# Altium PCB C500_DBR_ADT07016BR50_V1.0.2.PcbDoc
Units mil, origin at the board's own origin, x right, y up, seen from the top; angles counter-clockwise.
Board outline 7007.87 x 3937.01 mil, 2 copper layers (top, bottom), stack 12.7 mil thick; 134 components, 128 nets, 438 pads, 507 vias.
Unrouted connection lines stored in the file: 375.
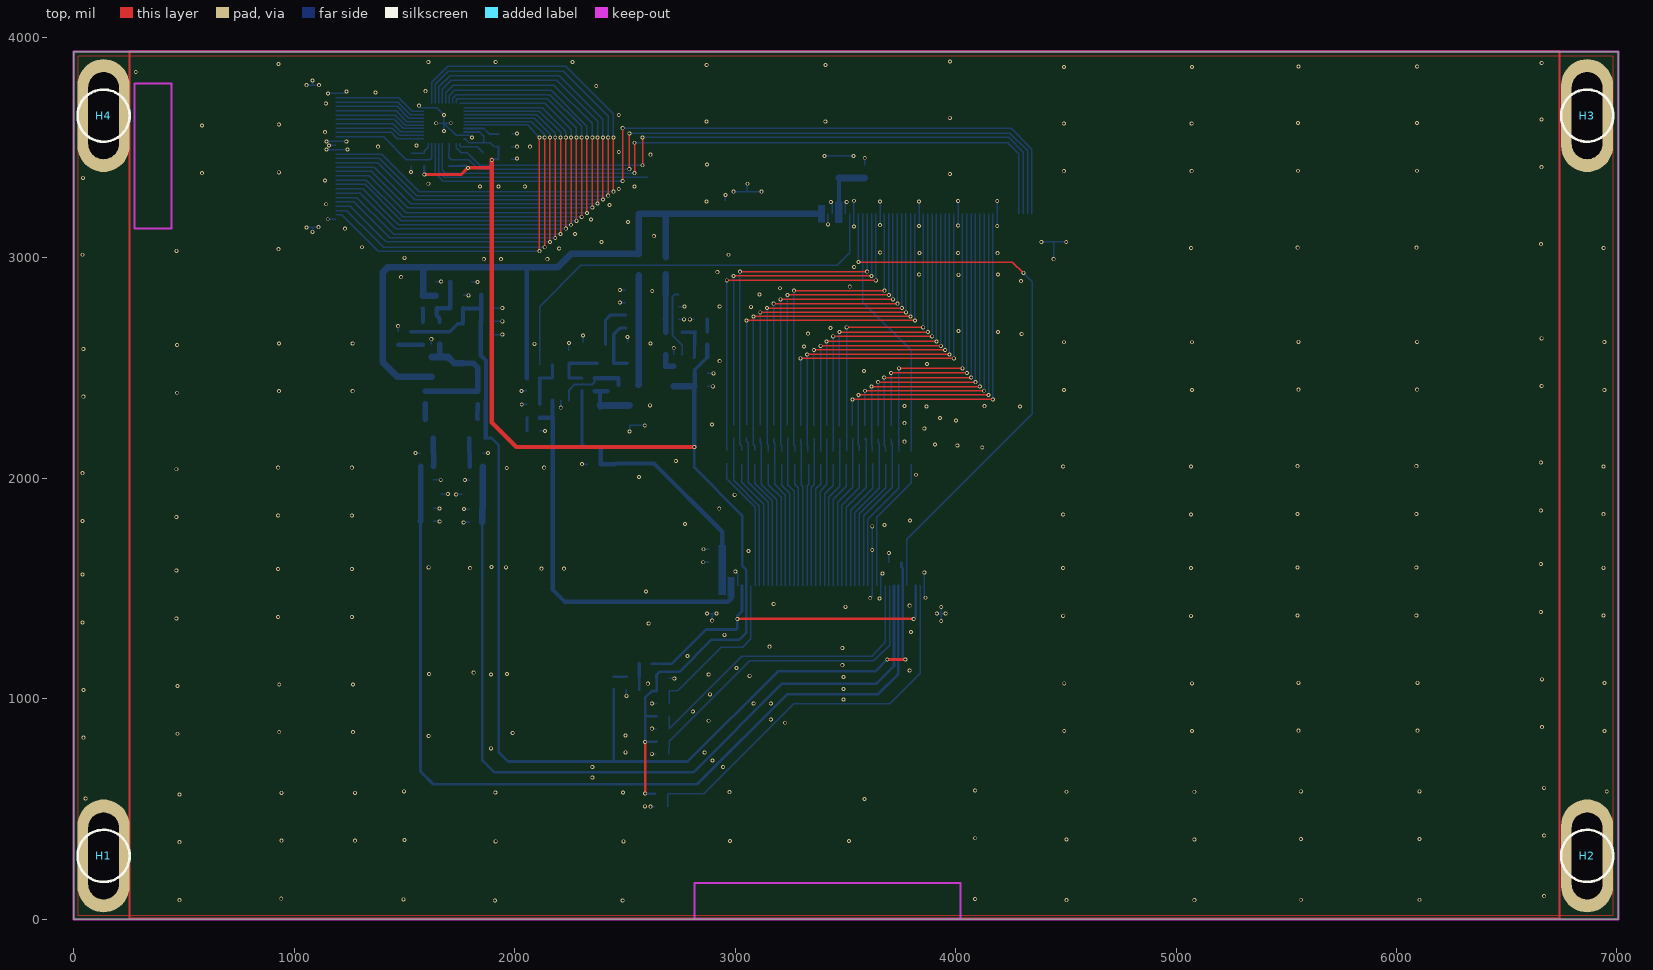
[diagram p0: top view]
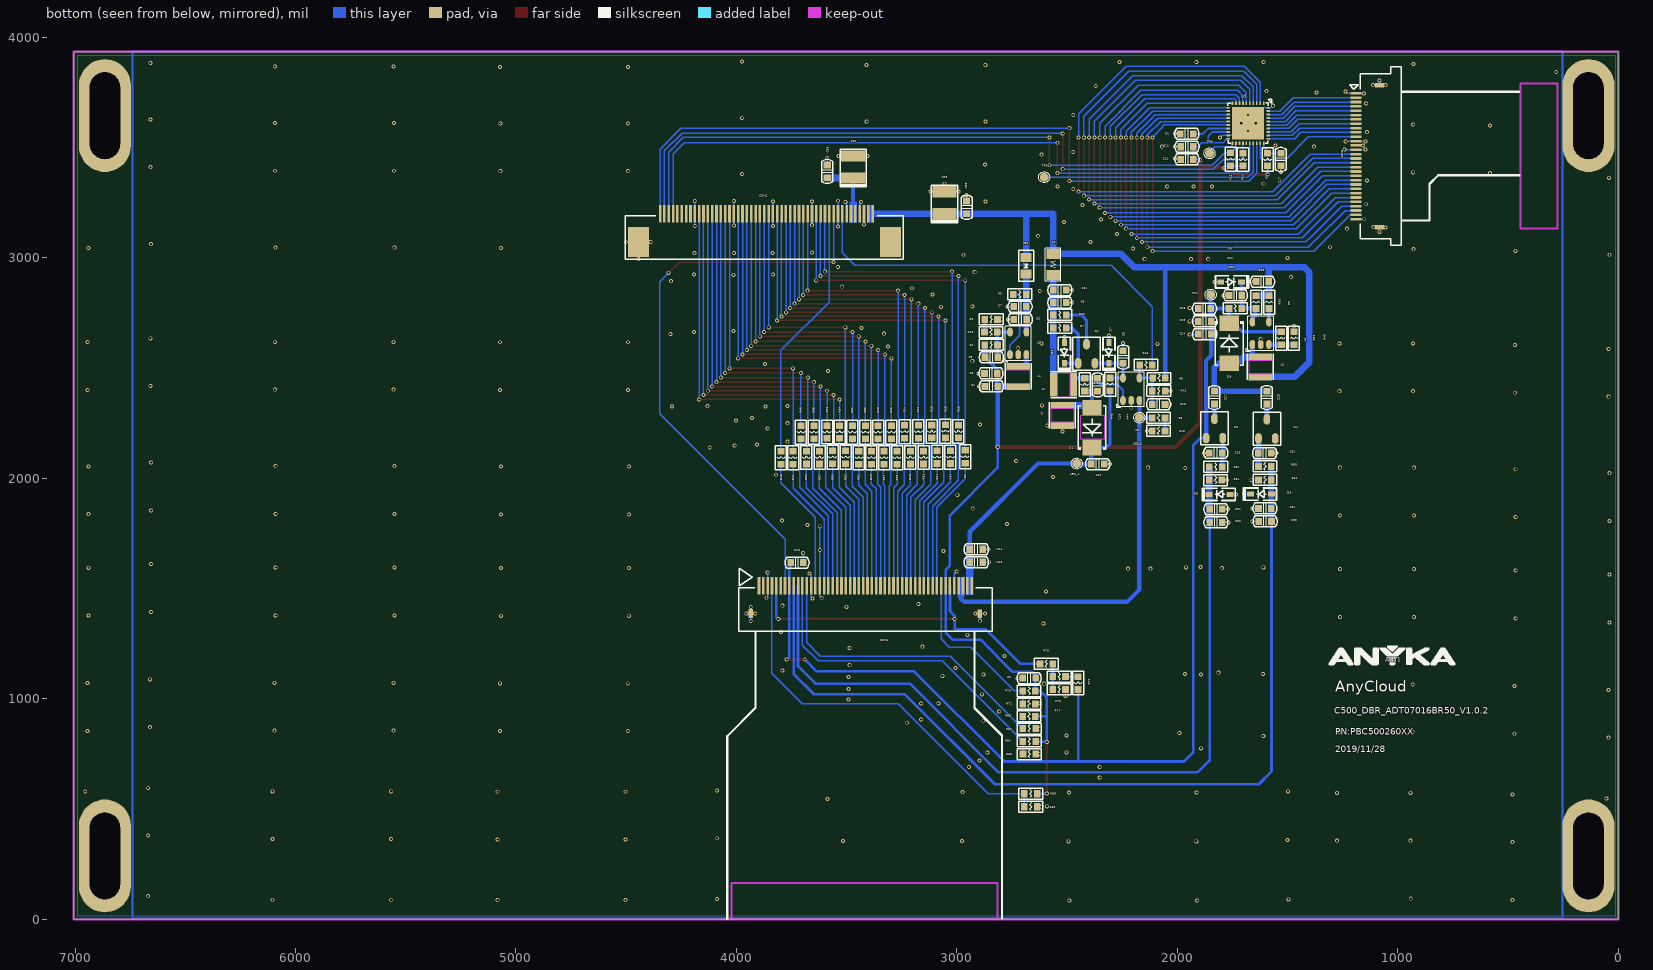
[diagram p1: bottom view, seen from below]

## Layer stack, top to bottom
Top Solder: solder mask 0.4, Solder Resist, Dk 3.5
top: signal copper 1.35
Dielectric 1: dielectric 10, FR-4, Dk 4.3
bottom: signal copper 1.35
Bottom Solder: solder mask 0.4, Solder Resist, Dk 3.5

## Board outline
-1,-1.4 7006.87,-1.4 7006.87,3935.61 -1,3935.61

## Design rules (kind name [scope] priority, off if disabled: settings)
Clearance "Clearance - Default - DEFAULT- SMD" [IsVia vs IsSMTPin] p1: gap=6 ignorepadtopadclearanceinfootprint=FALSE
Clearance "Clearance - Default - DEFAULT - Via" [IsVia vs IsVia] p2: gap=6 ignorepadtopadclearanceinfootprint=FALSE
Clearance "Clearance - Default - DEFAULT - Net" [All] p3: gap=6 ignorepadtopadclearanceinfootprint=FALSE except(0: Arc-Hole Track-Hole SMDPad-Hole THPad-Hole Via-Hole Fill-Hole Poly-Hole Region-Hole Text-Hole; 10: Text-Text)
ComponentClearance "ComponentClearance - Default - DEFAULT" [All] p1: gap=6 collisioncheckmode=3 verticalgap=10 showdistances=FALSE
FanoutControl Fanout_Small [(CompPinCount < 5)] p3: bgadir=Out bgaviamode=Centered fanoutstyle=Auto fanoutdirection=OutThenIn viagrid=1 // Fanout_Small (Default Rule)
FanoutControl Fanout_SOIC [IsSOIC] p4: bgadir=Out bgaviamode=Centered fanoutstyle=Auto fanoutdirection=Alternating viagrid=1 // Fanout_SOIC (Default Rule)
HoleToHoleClearance "HoleToHoleClearance - Default - DEFAULT" [All] p1: gap=6 allowstackedmicrovias=TRUE
Length "Default Length" [All] p1: maxlimit=50000 minlimit=0
MaxMinImpedance "Default Impedance" [All] p1: minimum=50.00 maximum=150.0
ParallelSegment "Default Parallel Segment Adjasent" [All] p1: limit=1000 gap=200
ParallelSegment "Default Parallel Segment Same Layer" [All] p2: limit=1000 gap=200
PlaneConnect "Default PlaneConnect" [All] p1: planeconnectstyle=Direct reliefexpansion=20 reliefentries=4 reliefconductorwidth=10 reliefairgap=10
PolygonConnect "PolygonConnect - Default SMT" [IsSMTPin] p1: connectstyle=Direct reliefconductorwidth=10 reliefentries=4 polygonreliefangle="45 Angle" airgapwidth=10
PolygonConnect "PolygonConnect - Default Pad" [All] p2: connectstyle=Direct reliefconductorwidth=10 reliefentries=4 polygonreliefangle="45 Angle" airgapwidth=10
RoutingLayers "RoutingLayers - Default - DEFAULT" [All] p1: top layer_v5=TRUE bottom layer_v5=TRUE
RoutingPriority "RoutingPriority - Default - DEFAULT" [All] p1: routingpriority=3
RoutingTopology "Default Routing Topology" [All] p1: topology=Shortest
RoutingVias "RoutingVias - Default - DEFAULT" [All] p1: holewidth=10 width=18 viastyle="Through Hole" minholewidth=10 minwidth=18 maxholewidth=10 maxwidth=18
SMDToCorner "SMDToCorner - Default - DEFAULT" [All] p1: distance=60000
SolderMaskExpansion [All] p1: expansion=4 istentingtop=FALSE
Width "Default Width" [All] p1: maxlimit=6 minlimit=6 preferedwidth=6
20 further rules are at their usual default settings.

## Components (designator, comment, footprint, x,y, rotation, side; value= is the part's Value field where it differs from the comment)
ANY1 "LOGO_ANYKA" LOGO_ANYKA 1024,1179.6 r180 bottom
C1 "C0603" C0603 1957,3562 r0 bottom
C2 "C0603" C0603 2672,1093 r0 bottom
C3 "C0603" C0603 2712.6,2721 r0 bottom
C4 "C0603" C0603 2843.6,2417 r180 bottom
C5 "C0603" C0603 2843.6,2549 r0 bottom
C6 "C0603" C0603 2845.6,2476 r180 bottom
C7 "C0603" C0603 2713.6,2779 r0 bottom
C8 "C0603" C0603 2246,2550 r90 bottom
C9 "C0603" C0603 2533,2797 r180 bottom
C10 "C0603" C0603 2361,2064 r180 bottom
C11 "C0603" C0603 1956,3504 r0 bottom
C12 "C0603" C0603 1956,3447 r0 bottom
C13 "C0603" C0603 3725,1617 r180 bottom
C14 "C0603" C0603 2912,1678 r180 bottom
C15 "C0603" C0603 2912,1619 r180 bottom
C16 "C0603" C0603 2362,2424 r270 bottom
C17 "C0603" C0603 1530,3446 r270 bottom
C18 "C0603" C0603 2085,2335 r180 bottom
C21 "C0603" C0603 2533,2854 r180 bottom
C22 "C0603" C0603 1736.6,2830 r0 bottom
C23 "C0603" C0603 1613.6,2892 r0 bottom
C24 "C0603" C0603 1875.6,2654 r0 bottom
C25 "C0603" C0603 1875.6,2712 r0 bottom
C26 "C0603" C0603 1876.6,2770 r0 bottom
C27 "C0603" C0603 1831.6,2366 r270 bottom
C28 "C0603" C0603 1593.6,2366 r270 bottom
C29 "C0603" C0603 1825.6,2115 r180 bottom
C30 "C0603" C0603 1824.6,1800 r0 bottom
C31 "C0603" C0603 1824.6,1860 r180 bottom
C32 "C0603" C0603 1603.6,2114 r0 bottom
C33 "C0603" C0603 1601.6,1804 r180 bottom
C34 "C0603" C0603 1602.6,1863 r0 bottom
C88 "C0603" C0603 3588,3392 r270 bottom
C89 "C0603" C0603 2956,3229 r270 bottom
CON1 "CON50_0MM5" CON50_0MM5 3864,3200 r180 bottom
CON2 "CON30_0MM5" CON30_0MM5 1150,3460.6 r90 bottom
CON4 "SAT070AT50D18_LCD" SAT070AT50D18_LCD 2933,1473 r180 bottom
CP2 "C1210_PN" C1210_PN 3470,3412 r90 bottom
CP3 "C1210_PN" C1210_PN 3056,3250 r90 bottom
D1 "SS14" SS14 2387,2230 r270 bottom
D2 "BAV-99_SOT23_123" BAV-99_SOT23_123 1831.6,2226 r180 bottom
D3 "UDZS5.6B" UDZS5.6B 2512,2569 r270 bottom
D4 "BAV-99_SOT23_123" BAV-99_SOT23_123 1593.6,2224 r180 bottom
D5 "SS14" SS14 1764.6,2612 r90 bottom
D6 "UDZS5.6B" UDZS5.6B 1755.6,2891 r180 bottom
D7 "UDZS5.6B" UDZS5.6B 2310,2569 r270 bottom
D8 "UDZS5.6B" UDZS5.6B 1808.6,1927 r0 bottom
D9 "UDZS5.6B" UDZS5.6B 1620.6,1928 r0 bottom
FB1 "FB0805" FB0805 2686,2964 r90 bottom
H1 "SCREWING_H_3MM" SCREWING_H_3MM 135,287 r0 top
H2 "SCREWING_H_3MM" SCREWING_H_3MM 6865,287 r0 top
H3 "SCREWING_H_3MM" SCREWING_H_3MM 6865,3645 r0 top
H4 "SCREWING_H_3MM" SCREWING_H_3MM 135,3645 r0 top
L1 "L_SWPA3012_3X3MM" L_SWPA3012_3X3MM 2721.6,2462 r270 bottom
L2 "L_SWPA3012_3X3MM" L_SWPA3012_3X3MM 2516,2424 r180 bottom
L3 "L_SWPA3012_3X3MM" L_SWPA3012_3X3MM 1623.6,2505 r90 bottom
L4 "L_SWPA3012_3X3MM" L_SWPA3012_3X3MM 2521,2285 r90 bottom
L5 "L1206" L1206 2563,2969 r180 bottom
LED_A "TP40" TP40 2456,2067 r180 bottom
LED_K "TP40" TP40 2172,2275 r180 bottom
Q1 "2N3904$2F$PMBT3904_SOT23_BCE_NPN" 2N3904$2F$PMBT3904_SOT23_BCE_NPN 2412,2565 r180 bottom
R1 "R0603" R0603 1590,3446 r90 bottom
R2 "R0603" R0603 2962,2098 r90 bottom
R3 "R0603" R0603 2714.6,2834 r0 bottom
R4 "R0603" R0603 2844.6,2605 r180 bottom
R5 "R0603" R0603 2844.6,2721 r180 bottom
R6 "R0603" R0603 2083,2454 r0 bottom
R7 "R0603" R0603 2533,2682 r0 bottom
R8 "R0603" R0603 2085,2274 r0 bottom
R9 "R0603" R0603 1583.6,2799 r270 bottom
R10 "R0603" R0603 1736.6,2771 r0 bottom
R11 "R0603" R0603 1702,3446 r90 bottom
R12 "R0603" R0603 1758,3447 r90 bottom
R13 "R0603" R0603 2993,2212 r90 bottom
R14 "R0603" R0603 3029,2096 r90 bottom
R15 "R0603" R0603 3052,2213 r90 bottom
R16 "R0603" R0603 2142,2514 r0 bottom
R17 "R0603" R0603 3090,2096 r90 bottom
R18 "R0603" R0603 2845.6,2663 r0 bottom
R19 "R0603" R0603 3114,2212 r90 bottom
R20 "R0603" R0603 2533,2741 r0 bottom
R21 "R0603" R0603 3151,2094 r90 bottom
R22 "R0603" R0603 3175,2211 r90 bottom
R23 "R0603" R0603 3211,2094 r90 bottom
R24 "R0603" R0603 3237,2211 r90 bottom
R25 "R0603" R0603 3271,2093 r90 bottom
R26 "R0603" R0603 3297,2209 r90 bottom
R27 "R0603" R0603 3330,2093 r90 bottom
R28 "R0603" R0603 3357,2209 r90 bottom
R29 "R0603" R0603 3388,2093 r90 bottom
R30 "R0603" R0603 3415,2209 r90 bottom
R31 "R0603" R0603 3445,2093 r90 bottom
R32 "R0603" R0603 3474,2209 r90 bottom
R33 "R0603" R0603 3505,2095 r90 bottom
R34 "R0603" R0603 3532,2210 r90 bottom
R35 "R0603" R0603 3564,2095 r90 bottom
R36 "R0603" R0603 3589,2210 r90 bottom
R37 "R0603" R0603 3623,2094 r90 bottom
R38 "R0603" R0603 3649,2209 r90 bottom
R39 "R0603" R0603 3683,2094 r90 bottom
R40 "R0603" R0603 3708,2209 r90 bottom
R41 "R0603" R0603 3743,2093 r90 bottom
R42 "R0603" R0603 2084,2396 r180 bottom
R43 "R0603" R0603 2420,2425 r90 bottom
R44 "R0603" R0603 2305,2426 r270 bottom
R45 "R0603" R0603 2085,2215 r180 bottom
R46 "R0603" R0603 3798,2093 r90 bottom
R49 "R0603" R0603 1471.6,2635 r270 bottom
R50 "R0603" R0603 1642.6,2799 r270 bottom
R51 "R0603" R0603 1528.6,2635 r90 bottom
R52 "R0603" R0603 1825.6,2052 r0 bottom
R54 "R0603" R0603 1826.6,1992 r0 bottom
R60 "R0603" R0603 1602.6,2054 r180 bottom
R61 "R0603" R0603 1602.6,1993 r180 bottom
R64 "R0603" R0603 2672,806 r0 bottom
R65 "R0603" R0603 2671,749 r180 bottom
R66 "R0603" R0603 2673,920 r0 bottom
R67 "R0603" R0603 2672,864 r180 bottom
R68 "R0603" R0603 2665,569 r0 bottom
R69 "R0603" R0603 2665,510 r180 bottom
R70 "R0603" R0603 2673,1035 r0 bottom
R71 "R0603" R0603 2673,977 r180 bottom
R72 "R0603" R0603 2450,1071 r90 bottom
R73 "R0603" R0603 2536,1100 r0 bottom
R74 "R0603" R0603 2536,1042 r180 bottom
R75 "R0603" R0603 2594,1158 r180 bottom
TP3 "TP40" TP40 2604,3366 r180 bottom
TP4 "TP40" TP40 1848.6,2833 r90 bottom
TP5 "TP40" TP40 1854,3474 r180 bottom
U2 "TLV62568_SOT23-5" TLV62568_SOT23-5 2721.6,2611 r180 bottom
U3 "MPS3302_SOT23-5" MPS3302_SOT23-5 2209,2403 r180 bottom
U4 "MPS3302_SOT23-5" MPS3302_SOT23-5 1621.6,2657 r180 bottom
U5 "ICNT8110" ICNT8110 1608,3701 r180 bottom

## Footprints (in the part's own frame and the unit in brackets; to place one, negate y for a bottom-side part, rotate by r counter-clockwise, add the part's x,y. Pads: shape width x height; smd on the part's side, far side on the other; paste and mask are expansions set on the pad)
2N3904$2F$PMBT3904_SOT23_BCE_NPN [mil]
  oval 30x48 smd: B(-38,-43.5) C(0,43.5) E(38,-43.5)
  silkscreen extent -63,-75 63,75
BAV-99_SOT23_123 [mil]
  oval 30x48 smd: 1(-38,-43.5) 2(38,-43.5) 3(0,43.5)
  silkscreen extent -63,-75 63,75
C0603 [mil]
  rect 30x32 smd: 1(-29,0) 2(29,0)
  silkscreen extent -55,-25 55,25
C1210_PN [mil]
  rect 51x110 smd: 1(-50,0) 2(50,0)
  silkscreen extent -90,-60 80,60
CON30_0MM5 [mm]
  rect 0.3x1.25 smd: 1(7.25,1) 2(6.75,1) 3(6.25,1) 4(5.75,1) 5(5.25,1) 6(4.75,1) 7(4.25,1) 8(3.75,1) 9(3.25,1) 10(2.75,1) 11(2.25,1) 12(1.75,1) 13(1.25,1) 14(0.75,1) 15(0.25,1) 16(-0.25,1) 17(-0.75,1) 18(-1.25,1) 19(-1.75,1) 20(-2.25,1) 21(-2.75,1) 22(-3.25,1) 23(-3.75,1) 24(-4.25,1) 25(-4.75,1) 26(-5.25,1) 27(-5.75,1) 28(-6.25,1) 29(-6.75,1) 30(-7.25,1)
  rect 0.5x1 smd: 31(-8.19,-1.7) 32(8.19,-1.7)
  silkscreen extent -10.25,-4.2 10.3,1.75
CON50_0MM5 [mm]
  rect 0.3x2 smd: 1(12.25,0) 2(11.75,0) 3(11.25,0) 4(10.75,0) 5(10.25,0) 6(9.75,0) 7(9.25,0) 8(8.75,0) 9(8.25,0) 10(7.75,0) 11(7.25,0) 12(6.75,0) 13(6.25,0) 14(5.75,0) 15(5.25,0) 16(4.75,0) 17(4.25,0) 18(3.75,0) 19(3.25,0) 20(2.75,0) 21(2.25,0) 22(1.75,0) 23(1.25,0) 24(0.75,0) 25(0.25,0) 26(-0.25,0) 27(-0.75,0) 28(-1.25,0) 29(-1.75,0) 30(-2.25,0) 31(-2.75,0) 32(-3.25,0) 33(-3.75,0) 34(-4.25,0) 35(-4.75,0) 36(-5.25,0) 37(-5.75,0) 38(-6.25,0) 39(-6.75,0) 40(-7.25,0) 41(-7.75,0) 42(-8.25,0) 43(-8.75,0) 44(-9.25,0) 45(-9.75,0) 46(-10.25,0) 47(-10.75,0) 48(-11.25,0) 49(-11.75,0) 50(-12.25,0)
  rect 2.4x3.5 smd: 51(-14.75,-3.25) 52(14.3,-3.25)
  silkscreen extent -16.25,-5.25 15.75,-0.25
FB0805 [mil]
  rect 40x50 smd: 1(-38,0) 2(38,0)
  silkscreen extent -71,-34 71,34
ICNT8110 [mm]
  rect 0.2x0.4 smd: 1(0,0) 2(-0.4,0) 3(-0.8,0) 4(-1.2,0) 5(-1.6,0) 6(-2,0) 7(-2.4,0) 8(-2.8,0) 9(-3.2,0) 10(-3.6,0) 21(-3.6,-4.6) 22(-3.2,-4.6) 23(-2.8,-4.6) 24(-2.4,-4.6) 25(-2,-4.6) 26(-1.6,-4.6) 27(-1.2,-4.6) 28(-0.8,-4.6) 29(-0.4,-4.6) 30(0,-4.6)
  rect 0.4x0.2 smd: 11(-4.1,-0.5) 12(-4.1,-0.9) 13(-4.1,-1.3) 14(-4.1,-1.7) 15(-4.1,-2.1) 16(-4.1,-2.5) 17(-4.1,-2.9) 18(-4.1,-3.3) 19(-4.1,-3.7) 20(-4.1,-4.1) 31(0.5,-4.1) 32(0.5,-3.7) 33(0.5,-3.3) 34(0.5,-2.9) 35(0.5,-2.5) 36(0.5,-2.1) 37(0.5,-1.7) 38(0.5,-1.3) 39(0.5,-0.9) 40(0.5,-0.5)
  rrect0% 3.7x3.7 smd: 41(-1.8,-2.3)
  silkscreen extent -4.15,-4.61 0.94,0.44
L1206 [mil]
  rect 60x45 smd: 1(0,47.5) 2(0,-47.5)
  silkscreen extent -35,-75 35,75
L_SWPA3012_3X3MM [mm]
  rect 0.8x2.7 smd: 1(-1.15,0) 2(1.15,0)
  silkscreen extent -1.5,-1.5 1.5,1.5
LOGO_ANYKA [mil]
  silkscreen extent -289,-28 284,59
MPS3302_SOT23-5 [mil]
  oval 25x40 smd: 1(-37.4,-50) 2(0,-50) 3(37.4,-50) 4(37.4,51.97) 5(-37.4,51.97)
  silkscreen extent -65,-84 59,79
R0603 [mil]
  rect 30x32 smd: 1(-29,0) 2(29,0)
  silkscreen extent -54,-25 54,25
SAT070AT50D18_LCD [mm]
  rect 0.3x2 smd: 1(-24.5,1) 2(-24,1) 3(-23.5,1) 4(-23,1) 5(-22.5,1) 6(-22,1) 7(-21.5,1) 8(-21,1) 9(-20.5,1) 10(-20,1) 11(-19.5,1) 12(-19,1) 13(-18.5,1) 14(-18,1) 15(-17.5,1) 16(-17,1) 17(-16.5,1) 18(-16,1) 19(-15.5,1) 20(-15,1) 21(-14.5,1) 22(-14,1) 23(-13.5,1) 24(-13,1) 25(-12.5,1) 26(-12,1) 27(-11.5,1) 28(-11,1) 29(-10.5,1) 30(-10,1) 31(-9.5,1) 32(-9,1) 33(-8.5,1) 34(-8,1) 35(-7.5,1) 36(-7,1) 37(-6.5,1) 38(-6,1) 39(-5.5,1) 40(-5,1) 41(-4.5,1) 42(-4,1) 43(-3.5,1) 44(-3,1) 45(-2.5,1) 46(-2,1) 47(-1.5,1) 48(-1,1) 49(-0.5,1) 50(0,1)
  rect 0.5x1 smd: 51(-25.453,-2.205) 52(0.937,-2.22)
  silkscreen extent -26.81,-4.25 2.37,3
SCREWING_H_3MM [mm]
  oval 6x13 hole 3.5 slot 10 at 90 deg: 1(0,0)
  silkscreen extent -3,-3 3,3
SS14 [mm]
  rect 1.8x2.2 smd: A(-2.3,0) K(2.3,0)
  silkscreen extent -2.5,-1.6 2.5,1.6
TLV62568_SOT23-5 [mil]
  oval 25x40 smd: 1(-37.4,-50) 2(0,-50) 3(37.4,-50) 4(37.4,51.97) 5(-37.4,51.97)
  silkscreen extent -65,-84 59,79
TP40 [mil]
  round 40 smd: 1(0,0)
  silkscreen extent -25,-25 25,25
UDZS5.6B [mm]
  rect 0.8x0.6 smd: 1(-1.2,0) 2(1.2,0)
  silkscreen extent -1.8,-0.7 2,0.7

## Via types
v1: diameter 18, hole 10, top to bottom, 507 vias

## Nets (pads, with @x,y where several pads share a name; then routed paths per layer and width w, separated by ;. In a path a pad name is that pad's centre, name@x,y a point inside that pad or via, vN(x,y) a via of type N, cw(c..) or ccw(c..) an arc to the next point about the centre after c; other vN are vias at no path point)
$$$3299: R5.1 R18.2 | length 58.4
  bottom w15: R5.1 2873.6,2664 R18.2
$$$8433: C3.1 C7.1 FB1.1 R3.1 U2.4 | length 264.1
  bottom w25: U2.4 2684.2,2720.4 C3.1 2684.6,2722 C7.1 2685.6,2780 R3.1
  bottom w30: R3.1 2686,2837.4 FB1.1
$$$8434: R3.2 U2.1 | length 313
  bottom w8: R3.2 2726.6,2834 2715.6,2823 2715.6,2648 2759.6,2604 2759.6,2561.6 U2.1
$$$8435: L1.1 U2.3 | length 91.1
  bottom w25: U2.3 2684.2,2507.28 L1.1
$$$8436: C5.1 R4.2 R18.1 U2.5 | length 172.4
  bottom w15: U2.5 R18.1@2816.57,2662.97 ; C5.1 2815.6,2550 R4.2 2816.6,2606 R18.1
$$$14688: R9.2 U4.4 | length 61.3
  bottom w20: R9.2 1584.2,2769.4 U4.4
$$$14690: C22.1 D6.2 R10.1 R50.2 U4.5 | length 249.6
  bottom w20: R50.2@1645.74,2771 R50.2@1646,2771 ; U4.5 1659,2726 1646,2739 R50.2@1646,2771 ; D6.2 1707.6,2890.24 C22.1 R10.1 R50.2@1646,2771
$$$15194: C8.1 D7.2 Q1.E R44.1 U3.5 | length 253.2
  bottom w15: R44.1 U3.5 2246.4,2520.6 C8.1 2246.76,2521.76 D7.2 2310.26,2521.5 Q1.E
$$$15436: R72.2 R73.1 | length 57
  bottom w12: R72.2 R73.1
$$$16113: R49.2 R51.1 U4.3 | length 113
  bottom w20: R49.2 R51.1 1583.2,2606 U4.3
$$$16377: C27.2 D2.3 | length 67.9
  bottom w20: D2.3 1830.6,2270.5 C27.2
$$$16547: C18.1 R6.2 R16.2 R42.1 U3.4 | length 239.1
  bottom w15: C18.1 2114,2395 R42.1 2113,2453 R6.2 2112.97,2454.97 U3.4 2171.6,2513.4 R16.2
$$$16697: C29.2 D2.2 R52.1 | length 131.7
  bottom w20: D2.2 1793.6,2118 C29.2 R52.1
$$$16886: C16.1 L2.2 R43.2 U3.1 | length 333.6
  bottom w10: U3.1 2246,2353.4 2246,2399 2273,2426 2352,2426 2362,2436 C16.1
  bottom w20: C16.1 2419,2453 R43.2 2470.72,2454 L2.2
$$$17098: C28.2 D4.3 | length 69.5
  bottom w25: D4.3 C28.2
$$$17167: C32.2 D4.1 R60.1 | length 127.3
  bottom w25: R60.1 1632.6,2055 C32.2 1631.6,2115 D4.1
$$$19028: R73.2 R74.1 R75.2 | length 116
  bottom w12: R74.1 R73.2
  bottom w15: R73.2 R75.2
$$$20137: Q1.C R20.1 | length 211
  bottom w15: Q1.C 2412,2718 2435,2741 R20.1
$$$20747: C16.2 D1.A L4.2 R43.1 | length 266.9
  bottom w20: C16.2 2387,2395 ; D1.A 2387,2330.28 2387,2395 ; R43.1 2419,2395 2387,2395
  bottom w30: D1.A@2387,2330.28 L4.2
$$$22232: C9.1 C21.1 L2.1 L5.2 R7.2 R20.2 | length 497.8
  bottom w30: L2.1 2562,2424.72 R7.2 R20.2 C9.1 C21.1 L5.2
$$$22340: R8.1 R45.2 | length 59
  bottom w15: R45.2 R8.1
$$$23973: D3.2 Q1.B R7.1 | length 260.2
  bottom w15: R7.1 2478,2682 2450,2654 Q1.B 2450.26,2521.76 D3.2
$$$24952: CON4.16 R41.1 | length 609.9
  bottom w6: CON4.16 3602.3,1814 3743,1954.7 R41.1
$$$24955: CON4.17 R40.1 | length 723.7
  bottom w6: CON4.17 3582.61,1829 3713,1959.39 3713,2157 3708,2162 R40.1
$$$24958: CON4.18 R39.1 | length 602.4
  bottom w6: CON4.18 3562.93,1838 3683,1958.07 R39.1
$$$24960: CON4.19 R38.1 | length 715.8
  bottom w6: CON4.19 3543.24,1843 3654.24,1954 3654.24,2156 3649.24,2161 3649.24,2179.76 R38.1
$$$24962: CON4.20 R37.1 | length 594.8
  bottom w6: CON4.20 3523.56,1855 3624,1955 3624,2064 R37.1
$$$24964: CON4.21 R36.1 | length 708.9
  bottom w6: CON4.21 3503.87,1868 3595,1959.13 3595,2175 R36.1
$$$24965: CON4.22 R35.1 | length 586.7
  bottom w6: CON4.22 3484.19,1877 3564,1956.81 R35.1
$$$24967: CON4.23 R34.1 | length 697.6
  bottom w6: CON4.23 3464.5,1890.5 3533,1959 3533,2180.5 R34.1
$$$24969: CON4.24 R33.1 | length 578.6
  bottom w6: CON4.24 3444.82,1904 3505,1964.18 R33.1
$$$24970: CON4.25 R32.1 | length 688.7
  bottom w6: CON4.25 3425.13,1915 3475,1964.87 3475,2179 R32.1
$$$24972: CON4.26 R31.1 | length 568
  bottom w6: CON4.26 3405.45,1929 3445,1968.55 R31.1
$$$24974: CON4.27 R30.1 | length 680.7
  bottom w6: CON4.27 3385.76,1942 3416,1972 3416,2179 R30.1
$$$24976: CON4.28 R29.1 | length 560.7
  bottom w6: CON4.28 3366.08,1952 3388,1973.92 R29.1
$$$24979: CON4.29 R28.1 | length 674.5
  bottom w6: CON4.29 3346.39,1959 3360,1972.61 3360,2177 R28.1
$$$24981: CON4.30 R27.1 | length 555.5
  bottom w6: CON4.30 3326.71,1967 3333,1973.29 3333,2061 R27.1
$$$24983: CON4.31 R26.1 | length 672.4
  bottom w6: R26.1 3298,2180 3298,2161 3300,2159 3300,1971.02 3307.02,1964 CON4.31
$$$24985: CON4.32 R25.1 | length 558.5
  bottom w6: R25.1 3271,1973 3287.34,1957 CON4.32
$$$24987: CON4.33 R24.1 | length 682.3
  bottom w6: R24.1 3238,2181 3238,1971.65 3267.65,1942 CON4.33
$$$24989: CON4.34 R23.1 | length 568.8
  bottom w6: R23.1 3211,1971.97 3210,1970.97 3247.97,1933 CON4.34
$$$24992: CON4.35 R22.1 | length 691.7
  bottom w6: R22.1 3175,2163 3180,2158 3180,1972.28 3228.28,1924 CON4.35
$$$24994: CON4.36 R21.1 | length 576.5
  bottom w6: R21.1 3151,1971.6 3208.6,1914 CON4.36
$$$24995: CON4.37 R19.1 | length 701.7
  bottom w6: R19.1 3113.91,2182.91 3113.91,2164 3118.91,2159 3118.91,1973 3188.91,1903 CON4.37
$$$24998: CON4.38 R17.1 | length 587.5
  bottom w6: R17.1 3090,1977.23 3169.23,1898 CON4.38
$$$25001: CON4.39 R15.1 | length 713.7
  bottom w6: R15.1 3052,2183 3050,2181 3050,2170 3059,2161 3059,1981.54 3149.54,1891 CON4.39
$$$25003: CON4.40 R14.1 | length 597.3
  bottom w6: R14.1 3029,1985.86 3028,1984.86 3129.86,1883 CON4.40
$$$25005: CON4.41 R13.1 | length 719.2
  bottom w6: R13.1 2993,1990.17 3110.17,1873 CON4.41
$$$25007: CON4.42 R2.1 | length 609.9
  bottom w6: R2.1 2962,1997.49 3090.49,1869 CON4.42
$$$26806: C17.1 R1.2 U5.30 | length 112.4
  bottom w6: C17.1 R1.2 1590,3484 1608,3502 U5.30
$$$27637: TP3.1 U5.27 | length 1088.2
  bottom w6: U5.27 1655.24,3390.76 1680,3366 TP3.1
$$$27638: TP5.1 U5.21 | length 132.6
  bottom w6: U5.21 1749.73,3510 1755.73,3504 1830,3504 1854,3480 TP5.1
$$$31504: CON4.14 R46.1 | length 616.4
  bottom w6: CON4.14 3641.67,1823.67 3798,1980 R46.1
+5V: C23.1 C89.2 CON1.1 CON1.2 CP3.1 FB1.2 L3.1 L5.1 R6.1 R9.1 R50.1 | length 3790.5
  bottom w6: CON1.1@3381,3221 3381.72,3220.28 CON1.1
  bottom w12: CON1.1 CON1.2
  bottom w20: R6.1 2054,2958
  bottom w30: L3.1 1469,2459.72 1401,2527.72 1401,2934 1425,2958 1584.6,2958 ; R50.1 R9.1 1584.6,2829 C23.1 1584.6,2958 ; FB1.2 2686,3200 ; CON1.1 CP3.1 C89.2 2686,3200 ; 1584.6,2958 2054,2958 2196,2958 2256,3018 2561.5,3018 L5.1 2563,3199 2562,3200 2686,3200
AVDD: C13.1 C24.1 C25.1 C26.1 CON4.8 D2.1 D5.K R10.2 R51.2 R72.1 TP4.1 | length 5355.9
  top w12: v1(3690,1178) v1(3772,1178)
  bottom w12: D2.1 1895,2182.5 1928.5,2149 1928.5,756 1969.5,715 2450,715 ; R72.1 2450,715 ; v1(3690,1178) 3636,1124 3194,1124 2785,715 2450,715 ; C13.1 3754.78,1616.22 3754.78,1596 3759.78,1591 CON4.8 3759.78,1190 3760,1190 v1(3772,1178)
  bottom w15: R51.2 1704.6,2664 1741.6,2701 1763.05,2701 D5.K
  bottom w20: D5.K 1765.6,2703.55 R10.2 1766.6,2770 C26.1 ; TP4.1 1848.6,2771 C26.1 ; D2.1 1870,2534 1846.6,2557.4 C24.1 C25.1 1847.6,2713 C26.1
AVDD_SW: C27.1 C28.1 D5.A L3.2 U4.1 | length 664.4
  bottom w25: C28.1 C27.1 1831.6,2503.45 1813.6,2521.45 D5.A ; L3.2 1656.27,2550.28 1659,2553 U4.1
  bottom w30: L3.2 1697.6,2550.28 1725.87,2522 1764.05,2522 D5.A
DITBH: CON4.4 R68.2 R69.1 | length 1827.7
  bottom w6: R69.1 R68.2 2695,570 2857.11,570 3265.11,978 3702,978 3839,1115 3839,1511.87 CON4.4
GND: C1.2 C2.2 C3.2 C4.1 C6.1 C7.2 C8.2 C9.2 C10.2 C11.2 C12.2 C13.2 C14.2 C15.2 C17.2 C18.2 C21.2 C22.2 C23.2 C24.2 C25.2 C26.2 C29.1 C30.1 C31.2 C32.1 C33.1 C34.2 C88.1 C89.1 CON1.3 CON1.4 CON1.7 CON1.9 CON1.15 CON1.24 CON1.33 CON1.42 CON1.51 CON2.1 CON2.12 CON2.13 CON2.14 CON2.30 CON2.31 CON2.32 CON4.3 CON4.13 CON4.15 CON4.46 CON4.51 CON4.52 CP2.2 CP3.2 D3.1 D4.2 D6.1 D7.1 D8.1 D9.2 H1.1 H2.1 H3.1 H4.1 L4.1 R5.2 R42.2 R45.1 R49.1 R54.1 R61.1 R65.2 R67.2 R69.2 R71.2 R74.2 U2.2 U3.2 U4.2 U5.19 U5.40 U5.41 | length 4412.5
  bottom w6: v1(1055,3138) 1055.16,3138.16 CON2.31 ; v1(1055,3783) 1055.04,3783.04 CON2.32 ; v1(1083,3118) 1083.07,3118.07 CON2.31 ; v1(1083,3804) 1083.07,3804 CON2.32 ; v1(1110,3139) 1109.16,3138.16 CON2.31 ; v1(1112,3783) 1111.96,3783.04 CON2.32 ; v1(1146,3492) 1147.87,3490.13 CON2.14 1240.13,3490.13 v1(1242,3492) ; v1(1146,3528) 1147.5,3529.5 CON2.12 1234.5,3529.5 v1(1236,3528) ; v1(1152,3175) 1152.17,3175.17 CON2.30 ; v1(1153,3746) CON2.1 1237,3746.03 v1(1237,3755) ; v1(1158,3510) 1158.19,3509.81 CON2.13 ; R49.1 v1(1471.6,2690) ; v1(1530,3390) C17.2 ; v1(1549.6,2114) C32.1 ; v1(1566,3690) 1566,3687.31 1572,3681.31 U5.40 1645.55,3681.31 v1(1678.87,3648) U5.41 ; U4.2 v1(1621.6,2631) ; C33.1 v1(1659.6,1804) ; C34.2 v1(1658.6,1863) ; R61.1 v1(1664.6,1993) ; C23.2 v1(1666.6,2892) ; v1(1644,3610.45) U5.41 ; D9.2 v1(1696.6,1928) ; v1(1678.87,3576) U5.41 ; v1(1710,3610.45) U5.41 ; v1(1734.6,1927) D8.1 ; C22.2 v1(1790.6,2830) ; v1(1768.6,1800) C30.1 ; U5.19 1782,3555.33 ; v1(1770.6,1860) C31.2 ; v1(1773.6,1992) R54.1 ; D6.1 v1(1831.6,2891) ; v1(1806,3546) 1794,3555.33 1782,3555.33 ; C29.1 1854.6,2114 v1(1879.6,2114) ; C24.2 1904.6,2652 v1(1944,2652) ; C25.2 v1(1944,2712) ; C26.2 1905.6,2772 v1(1944,2772) ; C12.2 2007,3447 v1(2010,3450) ; C11.2 v1(2010,3504) ; C1.2 2008,3562 v1(2010,3564) ; v1(2031,2396) R42.2 ; v1(2032,2335) C18.2 ; R45.1 v1(2137,2215) ; v1(2209,2320) U3.2 ; C8.2 v1(2246,2614) ; v1(2305,2064) C10.2 ; D7.1 v1(2310,2647) ; v1(2477,2797) C9.2 ; v1(2477,2854) C21.2 ; v1(2507,1013) R74.2 ; D3.1 v1(2512,2641) ; v1(2521,2212) L4.1 2589.72,2239.72 v1(2590,2240) ; v1(2616,510) R69.2 ; v1(2622,750) 2623,749 R65.2 ; v1(2622,864) R67.2 ; v1(2622,978) 2623,977 R71.2 ; C2.2 2723,1093 v1(2724,1092) ; U2.2 v1(2721.6,2590) ; C3.2 v1(2768.6,2721) ; C7.2 v1(2770.6,2779) ; v1(2794.6,2721) R5.2 ; v1(2855,1619) C15.2 ; v1(2856,1678) C14.2 ; C4.1 v1(2898.6,2417) ; v1(2873,1386) 2873.4,1385.6 CON4.52 ; C6.1 v1(2901.6,2476) ; v1(2896,1354) 2896.1,1354.1 CON4.52 ; v1(2916,1386) 2915.6,1385.6 CON4.52 ; C89.1 v1(2956,3285) ; v1(2992,3300) CP3.2 ; v1(3001,1577) 3011.75,1566.25 CON4.46 ; v1(3056,3336) CP3.2 ; v1(3119,3300) CP3.2 ; v1(3405,3462) CP2.2 v1(3537,3462) ; v1(3421,3152) 3421.09,3152.09 CON1.3 ; v1(3434,3253) 3440.77,3246.23 CON1.4 ; CON1.7 3499.83,3253 v1(3506,3253) ; v1(3539,3142) 3539.2,3142.2 CON1.9 3539.2,3258.8 v1(3539,3259) ; C88.1 v1(3588,3452) ; v1(3613,1456) 3621.98,1464.98 CON4.15 ; v1(3655,1454) 3661,1460 3661.35,1460 CON4.13 3661.35,1560.35 v1(3669,1568) ; v1(3657,3148) 3657.31,3148.31 CON1.15 3657.31,3254.69 v1(3657,3255) ; C13.2 3697,1618 v1(3697,1661) ; v1(3834,3145) 3834.47,3145.47 CON1.24 3834.47,3255.53 v1(3834,3256) ; v1(3858,1573) 3858.2,1572.8 CON4.3 3858.2,1463.8 v1(3864,1458) ; v1(3915,1386) 3915.2,1386.2 CON4.51 ; v1(3935,1353) 3935.1,1353.1 CON4.51 ; v1(3935,1416) 3935.1,1415.9 CON4.51 ; v1(3955,1386) 3954.8,1386.2 CON4.51 ; v1(4012,3146) 4011.64,3146.36 CON1.33 4011.64,3257.64 v1(4012,3258) ; v1(4189,3145) 4188.8,3145.2 CON1.42 4188.8,3257.8 v1(4189,3258) ; v1(4389,3072) 4389.05,3072.05 CON1.51 ; v1(4445,2994) 4444.71,2994.29 CON1.51 ; v1@4502,3072.05 CON1.51 ; U5.41 1733.98,3555.33 1782,3555.33
  bottom w8: CON4.15 v1(3621.98,1674) v1(3621.98,1782)
  other v1: 1910,84 2490,84 479,86 4503,86 5083,86 5566,88 6105,88 1496,90 4089,92 941,93 6670,104 480,349 1914,353 2494,353 2977,355 3516,355 942,356 1276,356 1500,359 4503,361 5083,361 5566,363 6105,363 4089,367 6670,379 2591,512 3587,545 54,548 480,566 942,573 1276,573 1912,574 2492,574 2975,576 4503,578 5083,578 6954,579 1498,580 5566,580 6105,580 4089,584 6670,596 2352,642 2352,690 2946,690 2898,720 2862,756 2503,757 1893,775 44,823 1610,831 2503,833 470,841 1991,845 932,848 1266,848 4493,853 5073,853 6944,854 5556,855 6095,855 6660,871 3227,891 2880,900 3162,906 2808,942 3084,978 3162,978 3492,996 2886,1020 44,1040 3492,1044 470,1058 932,1065 1266,1065 2604,1068 4493,1070 5073,1070 6944,1071 5556,1072 6095,1072 6660,1088 3492,1098 3066,1104 1893,1110 2880,1110 1612,1112 1965,1112 1814,1118 3792,1128 3006,1140 3486,1152 2784,1194 3486,1230 3156,1236 2952,1290 3798,1302 2608,1341 39,1346 465,1364 927,1371 1261,1371 4488,1376 5068,1376 6939,1377 5551,1378 6090,1378 6655,1394 3501,1417 3792,1422 3175,1429 2596,1486 39,1563 465,1581 927,1588 1261,1588 2122,1590 2224,1590 1798,1592 4488,1593 5068,1593 6939,1594 5551,1595 6090,1595 1610,1596 1961,1596 1895,1598 6655,1611 3061,1670 3678,1788 2773,1793 39,1806 3793,1809 465,1824 927,1831 1261,1831 4488,1836 5068,1836 6939,1837 5551,1838 6090,1838 6655,1854 2928,1862 2998,1925 2564,2006 3821,2016 39,2023 465,2041 1964,2046 927,2048 1261,2048 2134,2048 4488,2053 5068,2053 6939,2054 5551,2055 6090,2055 6655,2071 2731,2078 4121,2139 4008,2148 3906,2153 3768,2166 3858,2226 2895,2244 3768,2250 4002,2262 3930,2274 4292,2325 3868,2326 4131,2327 3768,2328 2614,2331 43,2370 469,2388 931,2395 1265,2395 4492,2400 5072,2400 6943,2401 5555,2402 6094,2402 6659,2418 3585,2486 3870,2518 2930,2531 43,2587 3312,2598 469,2605 2090,2610 931,2612 1265,2612 2616,2612 4492,2617 5072,2617 6943,2618 5555,2619 6094,2619 6659,2635 4300,2655 3330,2656 4193,2664 4013,2668 3432,2682 3072,2778 2930,2779 3111,2833 2624,2849 3204,2862 3520,2869 4297,2894 1485,2912 4013,2923 3835,2924 4192,2924 2919,2935 3540,2958 1860,2994 1938,2994 2148,2994 1500,3000 40,3014 2970,3014 4190,3021 3836,3022 4012,3022 3658,3024 466,3032 928,3039 2202,3042 5069,3044 6940,3045 5552,3046 6091,3046 1308,3048 6656,3062 2394,3072 4502,3072 2631,3098 2274,3108 1230,3132 2514,3162 2346,3174 2430,3240 1145,3243 2870,3255 2472,3312 1842,3324 1926,3324 2046,3324 2544,3324 1608,3336 1140,3351 42,3363 3974,3380 582,3384 930,3388 4491,3393 5071,3393 5554,3395 6093,3395 6658,3411 2872,3423 2616,3468 2472,3480 1380,3504 2070,3504 1554,3510 1140,3570 582,3600 930,3605 4491,3610 5071,3610 5554,3612 6093,3612 2870,3619 3409,3619 6658,3628 3974,3635 2472,3648 1143,3700 1368,3750 1596,3756 2370,3780 281,3843 4492,3866 5072,3866 5555,3868 6094,3868 2871,3875 3410,3875 929,3879 6659,3884 1608,3888 1914,3888 2262,3888 3975,3891
L/R: CON4.12 R66.2 R67.1 | length 1455.9
  bottom w6: R66.2 R67.1 3029,1192 3029,1193 3619,1193 3681.04,1255.04 CON4.12
LCD_3V3: C88.2 CON1.5 CON1.6 CP2.1 | length 324.5
  bottom w6: CON1.5@3459,3216 3460.46,3214.54 CON1.5
  bottom w12: CON1.5@3461,3235 3461,3244.14 3471,3254.14 3480.14,3245 CON1.6
  bottom w20: CP2.1 3471,3361 3471,3254.14
  bottom w30: CP2.1 3587,3362 C88.2
LCD_RESET: CON1.10 CON4.7 | length 2660.1
  top w6: v1(3559,2981) 4258,2981 4307,2932 v1(4308,2932)
  bottom w6: CON1.10 3558.88,2981.12 v1(3559,2981) ; CON4.7 3779.46,1724 4348,2292.54 4348,2892 v1(4308,2932)
LED_A: C10.1 C14.1 C15.1 CON4.49 CON4.50 D1.K LED_A.1 R44.2 | length 1225.2
  bottom w15: R44.2 2305,2157 2322,2140 2386.45,2140 D1.K
  bottom w20: D1.K 2390,2136.45 C10.1 2453,2064 LED_A.1 2632,2067 2941,1758 C14.1 C15.1
LED_K: CON4.47 CON4.48 LED_K.1 R8.2 U3.3 | length 1885.5
  bottom w10: CON4.48 2972.38,1465 2984,1453 2982,1454 2992.06,1462.06 CON4.47
  bottom w20: R8.2 2171,2274 LED_K.1 ; U3.3 2171.6,2275.4 LED_K.1 ; 2982,1454 2967,1439 2228,1439 2172,1495 LED_K.1
LED_PWM: CON1.8 R16.1 | length 1950.2
  bottom w6: R16.1 2113,2779 2300,2966 3463.51,2966 3519.51,3022 CON1.8
MODE: CON4.43 R70.2 R71.1 | length 765.9
  bottom w6: R71.1 R70.2 2739,1035 2938,1234 3033.8,1234 3070.8,1271 CON4.43
RGB_B0: CON1.16 R25.2 | length 1489.7
  top w6: v1(3267,2851) v1(3677,2851)
  bottom w6: v1(3267,2851) 3267,2152 3271,2148 R25.2 ; v1(3677,2851) CON1.16
RGB_B1: CON1.17 R24.2 | length 1420.1
  top w6: v1(3237,2832) v1(3697,2832)
  bottom w6: R24.2 v1(3237,2832) ; CON1.17 3696.68,2832.32 v1(3697,2832)
RGB_B2: CON1.18 R23.2 | length 1589.4
  top w6: v1(3206,2812) v1(3716,2812)
  bottom w6: v1(3206,2812) 3206,2152 3211,2147 R23.2 ; v1(3716,2812) 3716,3200 CON1.18
RGB_B3: CON1.19 R22.2 | length 1521
  top w6: v1(3175,2792) v1(3736,2792)
  bottom w6: R22.2 v1(3175,2792) ; v1(3736,2792) CON1.19
RGB_B4: CON1.20 R21.2 | length 1690.8
  top w6: v1(3145,2772) v1(3756,2772)
  bottom w6: v1(3145,2772) 3145,2155 3151,2149 R21.2 ; CON1.20 3756,3200 v1(3756,2772)
RGB_B5: CON1.21 R19.2 | length 1620.4
  top w6: v1(3114,2753) v1(3775,2753)
  bottom w6: R19.2 v1(3114,2753) ; v1(3775,2753) 3775,3200 CON1.21
RGB_B6: CON1.22 R17.2 | length 1791.8
  top w6: v1(3083,2734) v1(3796,2734)
  bottom w6: v1(3083,2734) 3083,2155 3090,2148 R17.2 ; CON1.22 3796,3200 v1(3796,2734)
RGB_B7: CON1.23 R15.2 | length 1723.2
  top w6: v1(3052,2716) v1(3816,2716)
  bottom w6: R15.2 v1(3052,2716) ; CON1.23 3815,3200 3815,2716 v1(3816,2716)
RGB_G0: CON1.25 R33.2 | length 1434.1
  top w6: v1(3506,2685) v1(3853,2685)
  bottom w6: R33.2 3506,2124 v1(3506,2685) ; v1(3853,2685) 3854.16,2680 CON1.25
RGB_G1: CON1.26 R32.2 | length 1370
  top w6: v1(3473,2663) v1(3874,2663)
  bottom w6: v1(3473,2663) 3473,2238 R32.2 ; CON1.26 3873.84,2660 v1(3874,2663)
RGB_G2: CON1.27 R31.2 | length 1530.1
  top w6: v1(3445,2644) v1(3894,2644)
  bottom w6: R31.2 v1(3445,2644) ; CON1.27 3893.53,2642.47 v1(3894,2644)
RGB_G3: CON1.28 R30.2 | length 1460.1
  top w6: v1(3415,2621) v1(3913,2621)
  bottom w6: R30.2 v1(3415,2621) ; v1(3913,2621) 3913.21,2621.21 CON1.28
RGB_G4: CON1.29 R29.2 | length 1623
  top w6: v1(3388,2601) v1(3933,2601)
  bottom w6: R29.2 v1(3388,2601) ; CON1.29 3932.9,2601.1 v1(3933,2601)
RGB_G5: CON1.30 R28.2 | length 1558.2
  top w6: v1(3357,2582) v1(3953,2582)
  bottom w6: R28.2 v1(3357,2582) ; CON1.30 3952.58,2582.42 v1(3953,2582)
RGB_G6: CON1.31 R27.2 | length 1724.4
  top w6: v1(3327,2562) v1(3972,2562)
  bottom w6: v1(3327,2562) 3327,2148 3330,2145 R27.2 ; v1(3972,2562) 3972.27,2562.27 CON1.31
RGB_G7: CON1.32 R26.2 | length 1657
  top w6: v1(3297,2544) v1(3992,2544)
  bottom w6: R26.2 v1(3297,2544) ; CON1.32 3991.95,2544.05 v1(3992,2544)
RGB_PCLK: CON1.11 R46.2 | length 1168.9
  bottom w6: CON1.11 3578.57,2799.43 3798,2580 R46.2
RGB_R0: CON1.34 R41.2 | length 1366.1
  top w6: v1(3743,2499) v1(4031,2499)
  bottom w6: R41.2 v1(3743,2499) ; v1(4031,2499) 4031.32,2499.32 CON1.34
RGB_R1: CON1.35 R40.2 | length 1305
  top w6: v1(3708,2478) v1(4051,2478)
  bottom w6: R40.2 v1(3708,2478) ; v1(4051,2478) CON1.35
RGB_R2: CON1.36 R39.2 | length 1474
  top w6: v1(3676,2457) v1(4071,2457)
  bottom w6: v1(3676,2457) 3676,2149 3680,2145 R39.2 ; CON1.36 4070.69,2457.31 v1(4071,2457)
RGB_R3: CON1.37 R38.2 | length 1403
  top w6: v1(3649,2436) v1(4090,2436)
  bottom w6: R38.2 v1(3649,2436) ; v1(4090,2436) 4090.38,2468 CON1.37
RGB_R4: CON1.38 R37.2 | length 1569.7
  top w6: v1(3619,2416) v1(4110,2416)
  bottom w6: v1(3619,2416) 3619,2150 3623,2146 R37.2 ; v1(4110,2416) 4110.06,2448 CON1.38
RGB_R5: CON1.39 R36.2 | length 1502.1
  top w6: v1(3589,2397) v1(4130,2397)
  bottom w6: R36.2 v1(3589,2397) ; CON1.39 4129.75,2397.25 v1(4130,2397)
RGB_R6: CON1.40 R35.2 | length 1668.6
  top w6: v1(3559,2378) v1(4149,2378)
  bottom w6: v1(3559,2378) 3559,2153 3564,2149 R35.2 ; v1(4149,2378) 4149.43,2378.43 CON1.40
RGB_R7: CON1.41 R34.2 | length 1598
  top w6: v1(3532,2358) v1(4169,2358)
  bottom w6: R34.2 v1(3532,2358) ; v1(4169,2358) 4169.12,2358.12 CON1.41
RGB_VOGATE: CON1.14 R2.2 | length 1749.4
  top w6: v1(2962,2898) v1(3638,2898)
  bottom w6: R2.2 v1(2962,2898) ; CON1.14 3638,3200 v1(3638,2898)
RGB_VOHSYNC: CON1.12 R14.2 | length 1655.2
  top w6: v1(3022,2937) v1(3599,2937)
  bottom w6: v1(3022,2937) 3022,2154 3029,2147 R14.2 ; CON1.12 3598.25,2937.75 v1(3599,2937)
RGB_VOVSYNC: CON1.13 R13.2 | length 1586.1
  top w6: v1(2993,2918) v1(3619,2918)
  bottom w6: R13.2 v1(2993,2918) ; CON1.13 3619,3200 v1(3619,2918)
RX1: CON2.11 U5.29 | length 546.7
  bottom w6: CON2.11 1405,3549.18 1509.18,3445 1614,3445 1623.75,3454.75 U5.29
RX2: CON2.10 U5.31 | length 411.1
  bottom w6: CON2.10 1439,3568.87 1468.29,3539.58 U5.31
RX3: CON2.9 U5.32 | length 412.7
  bottom w6: CON2.9 1445,3588.55 1478.22,3555.33 U5.32
RX4: CON2.8 U5.33 | length 414.4
  bottom w6: CON2.8 1447,3608.24 1484.24,3571 1587.24,3571 U5.33
RX5: CON2.7 U5.34 | length 416
  bottom w6: CON2.7 1453,3627.92 1493.92,3587 1588.14,3587 U5.34
RX6: CON2.6 U5.35 | length 418.1
  bottom w6: CON2.6 1459,3647.61 1504.61,3602 1587.74,3602 U5.35
RX7: CON2.5 U5.36 | length 419.4
  bottom w6: CON2.5 1462,3667.29 1511.29,3618 1587.64,3618 U5.36
RX8: CON2.4 U5.37 | length 420.9
  bottom w6: CON2.4 1467,3686.98 1519.98,3634 1588.24,3634 U5.37
RX9: CON2.3 U5.38 | length 422.5
  bottom w6: CON2.3 1470,3706.66 1526.66,3650 1588.13,3650 U5.38
RX10: CON2.2 U5.39 | length 424.1
  bottom w6: CON2.2 1474,3726.35 1534.35,3666 1587.88,3666 U5.39
TS_INT: CON1.50 U5.28 | length 3430.2
  top w6: v1(2490,3348) v1(2490,3588)
  bottom w6: U5.28 1639.5,3384 1675.5,3348 v1(2490,3348) ; v1(2490,3588) 4252.28,3588 4346.28,3493 CON1.50
TS_RST: CON1.47 U5.26 | length 3174.6
  top w6: v1(2544,3384) v1(2544,3522)
  bottom w6: U5.26 1670.99,3398.06 1685.06,3384 v1(2544,3384) ; v1(2544,3522) 4237.24,3522 4287.23,3472.01 CON1.47
TS_SCL: CON1.48 R12.2 U5.22 | length 3065.6
  top w6: v1(2580,3420) v1(2580,3546)
  bottom w6: U5.22 1733.98,3499 1735,3499 R12.2 1782,3476 1782,3480 1842,3420 v1(2580,3420) ; v1(2580,3546) 4241.91,3546 4306.91,3479 CON1.48
TS_SDA: CON1.49 R11.2 U5.24 | length 3191.6
  top w6: v1(2520,3402) v1(2520,3564)
  bottom w6: U5.24 1702.49,3475.49 R11.2 1702,3457 1713,3446 1792,3446 1836,3402 v1(2520,3402) ; v1(2520,3564) 2520,3565 4246.6,3565 4326.6,3485 CON1.49
TX1: CON2.29 U5.16 | length 1874.8
  top w6: v1(2112,3030) v1(2112,3546)
  bottom w6: CON2.29 1216,3194.85 1359.85,3051 1380.85,3030 v1(2112,3030) ; U5.16 2059,3602.57 2112,3545.57 v1(2112,3546)
TX2: CON2.28 U5.15 | length 1917.4
  top w6: v1(2136,3048) v1(2136,3546)
  bottom w6: CON2.28 1239,3214.54 1373.54,3080 1405.54,3048 v1(2136,3048) ; U5.15 2076,3618.32 2136,3558.32 v1(2136,3546)
TX3: CON2.27 U5.14 | length 1948.3
  top w6: v1(2160,3072) v1(2160,3546)
  bottom w6: CON2.27 1255,3234.22 1390.22,3099 1417.22,3072 v1(2160,3072) ; U5.14 1984,3634.07 1984,3634 2088,3634 2160,3562 v1(2160,3546)
TX4: CON2.26 U5.13 | length 1987.7
  top w6: v1(2184,3090) v1(2184,3546)
  bottom w6: CON2.26 1270,3253.91 1405.91,3118 1433.91,3090 v1(2184,3090) ; U5.13 2100,3649.82 2184,3565.82 v1(2184,3546)
TX5: CON2.25 U5.12 | length 2026.9
  top w6: v1(2208,3108) v1(2208,3546)
  bottom w6: CON2.25 1284,3273.59 1422,3136.41 1450.41,3108 v1(2208,3108) ; U5.12 2112,3665.57 2208,3569.57 v1(2208,3546)
TX6: CON2.24 U5.11 | length 2058.6
  top w6: v1(2232,3132) v1(2232,3546)
  bottom w6: CON2.24 1189.09,3293 1300,3293 1461,3132 v1(2232,3132) ; U5.11 2124,3681.31 2232,3573.31 v1(2232,3546)
TX7: CON2.23 U5.10 | length 2121.1
  top w6: v1(2256,3150) v1(2256,3546)
  bottom w6: CON2.23 1310,3312.96 1449.39,3173.61 1473,3150 v1(2256,3150) ; U5.10 2136,3701 2256,3581 v1(2256,3546)
TX8: CON2.22 U5.9 | length 2197.7
  top w6: v1(2280,3168) v1(2280,3546)
  bottom w6: CON2.22 1321,3332.65 1466,3188 1486,3168 v1(2280,3168) ; U5.9 1733.98,3714 1741.98,3722 2148,3722 2280,3590 v1(2280,3546)
TX9: CON2.21 U5.8 | length 2268.3
  top w6: v1(2304,3186) v1(2304,3546)
  bottom w6: CON2.21 1327,3352.33 1477.59,3201.41 1493,3186 v1(2304,3186) ; U5.8 1718.24,3724 1734,3739.76 2160,3739.76 2304,3595.76 v1(2304,3546)
TX10: CON2.20 U5.7 | length 2339.8
  top w6: v1(2328,3204) v1(2328,3546)
  bottom w6: CON2.20 1340,3372.02 1501,3211.02 1508.02,3204 v1(2328,3204) ; U5.7 1702.49,3736 1726.49,3760 2166,3760 2328,3598 v1(2328,3546)
TX11: CON2.19 U5.6 | length 2412.2
  top w6: v1(2352,3228) v1(2352,3546)
  bottom w6: CON2.19 1350,3391.7 1507.99,3233.99 1513.98,3228 v1(2352,3228) ; U5.6 1686.74,3749 1721.74,3784 2178,3784 2352,3610 v1(2352,3546)
TX12: CON2.18 U5.5 | length 2490.2
  top w6: v1(2376,3246) v1(2376,3546)
  bottom w6: CON2.18 1362,3411.39 1527.39,3246 v1(2376,3246) ; U5.5 1670.99,3764 1712,3805.01 2190,3805.01 2376,3619.01 v1(2376,3546)
TX13: CON2.17 U5.4 | length 2567.1
  top w6: v1(2400,3264) v1(2400,3546)
  bottom w6: CON2.17 1379,3431.07 1546.07,3264 v1(2400,3264) ; U5.4 1655.24,3775 1707.24,3827 2202,3827 2400,3629 v1(2400,3546)
TX14: CON2.16 U5.3 | length 2644
  top w6: v1(2424,3282) v1(2424,3546)
  bottom w6: CON2.16 1386,3450.76 1554.76,3282 v1(2424,3282) ; U5.3 1639.5,3787 1698.5,3846 2220,3846 2424,3642 v1(2424,3546)
TX15: CON2.15 U5.2 | length 2721.2
  top w6: v1(2448,3300) v1(2448,3546)
  bottom w6: CON2.15 1396,3470.44 1566.44,3300 v1(2448,3300) ; U5.2 1623.75,3796 1696.75,3869 2232,3869 2448,3653 v1(2448,3546)
UPDN: CON4.11 R64.2 R65.1 | length 1507.1
  bottom w6: R65.1 R64.2 3067,1172 3629.72,1172 3700.72,1243 CON4.11
VCOM: CON4.5 CON4.45 R75.1 | length 1610.9
  top w12: v1(3010,1361) 3011,1362 v1(3810,1362)
  bottom w12: R75.1 2712,1158 2868,1314 3006,1314 3010,1318 v1(3010,1361) 3010,1375.57 3031.43,1397 CON4.45 ; v1(3810,1362) 3818.83,1371 CON4.5
VDD5: C1.1 U5.17 | length 168.9
  bottom w8: U5.17 1860,3586.83 1884.83,3562 C1.1
VDD_3V3: C2.1 C4.2 C5.2 C6.2 C11.1 C12.1 CON4.44 L1.2 R1.1 R4.1 R11.1 R12.1 R64.1 R66.1 R68.1 R70.1 U5.18 U5.20 | length 5722.7
  top w12: v1(2592,570) v1(2592,804)
  top w15: v1(1590,3378) 1758,3378 v1(1788,3408) 1896,3408
  top w20: v1(1896,3444) 1896,3408 1896,2253 2007,2142 v1(2815,2142)
  bottom w8: U5.20 1775,3539.58 1792.78,3521.81 1859.62,3521.81 ; U5.18 1840.54,3571.08 1859.62,3552 1859.62,3521.81 ; C11.1 1908.03,3503.58 1889.81,3521.81 1859.62,3521.81
  bottom w10: v1(1590,3378) R1.1 ; R11.1 1757,3417 R12.1 1776,3418 1778,3418 v1(1788,3408) ; v1(1896,3444) 1899,3447 C12.1 C11.1
  bottom w12: v1(2592,570) 2593,569 R68.1 ; R64.1 2639,804 v1(2592,804) 2592,920 ; R66.1 2592,920 ; v1(2815,2142) 2815,2048 3032,1831 3032,1603.93 3051.12,1584.82 CON4.44 3051.12,1300.12 3019,1268 2893,1268 2747,1122 2657,1122 2643,1108 C2.1 2644,1092 R70.1 2622,1035 2592,1005 2592,920
  bottom w15: C6.2 2816.6,2493 C5.2
  bottom w20: C4.2 2814.6,2281.4 v1(2815,2142) ; C4.2@2816.6,2419 C6.2 ; C5.2 2873.6,2550 R4.1
  bottom w25: C4.2 C4.2@2816.6,2419
  bottom w30: L1.2 2814.32,2416.72 C4.2
VGH: C30.2 C31.1 CON4.10 D8.2 R52.2 R54.2 | length 3786.5
  bottom w12: C30.2 1853.6,720 1907.6,666 2811,666 3213,1068 3641,1068 3720.41,1147.41 CON4.10
  bottom w30: C30.2 C31.1 1855.84,1864.76 D8.2 1855.6,1927.24 R54.2 1854.6,1993 R52.2
VGL: C33.2 C34.1 CON4.9 D9.1 R60.2 R61.2 | length 4183
  bottom w12: C33.2 1572.6,670 1630.6,612 2828,612 3236,1020 3647,1020 3740.09,1113.09 CON4.9
  bottom w25: C33.2 1573.6,1805 C34.1 1573.35,1863.24 D9.1 1573.6,1928.24 R61.2 R60.2
pads on no net: CON1.43 CON1.44 CON1.45 CON1.46 CON1.52 CON4.1 CON4.2 CON4.6 U5.1 U5.23 U5.25

## Polygon pours and split planes (outlines as drawn)
GND on top (solid, remove dead copper, pour order 0): 19,18.6 6984,18.6 6984,3913.6 19,3913.6
GND on bottom (solid, remove dead copper, pour order 1): 14,13.6 6989,13.6 6989,3918.6 14,3918.6

## Keep-outs
bottom:
  region: -8748.99,-16364.08 -8683.99,-16364.08 -8683.99,-16479.08 -8748.99,-16479.08 -8748.99,-16364.08
  region: 1677,2475 1564,2475 1564,2534 1677,2534 1677,2475
  region: 2782,2432 2668,2432 2668,2491 2782,2491 2782,2432
  region: 2575,2257 2468,2257 2468,2315 2575,2315 2575,2257
  region: 2330,2284 2441,2284 2441,2179 2330,2179 2330,2284
  region: -10083.99,-17044.08 -9963.99,-17044.08 -9963.99,-17104.08 -10083.99,-17104.08 -10083.99,-17044.08
  region: 2544,2477 2544,2370 2486,2370 2486,2477 2544,2477
  region: -9763.99,-17044.08 -9643.99,-17044.08 -9643.99,-17109.08 -9763.99,-17109.08 -9763.99,-17044.08
  region: -9328.99,-16734.08 -9393.99,-16734.08 -9393.99,-16849.08 -9328.99,-16849.08 -9328.99,-16734.08
Keep-Out Layer:
  lines w10: -1,-1.4 -1,3935.61 7006.87,3935.61 7006.87,-1.4 -1,-1.4 ; 276,3133.6 276,3790.6 443,3790.6 443,3133.6 276,3133.6 ; 2816,1 2816,164 4023,164 4023,1 2816,1

## Other copper
bottom:
  region net +5V: 3376,3239 3407,3239 3407,3161 3376,3161 3376,3239
  region net LED_K: 2997,1460 2967,1460 2967,1552 2997,1552 2997,1460
  region net LCD_3V3: 3486,3160 3454,3160 3454,3254 3486,3254 3486,3160
  region net LED_A: 2958,1471 2926,1471 2926,1697 2958,1697 2958,1471
Multi-Layer:
  lines w10: 252,1.6 252,3936.6 6739,3936.6 6739,1.6 252,1.6

## Silkscreen, mask and mechanical layers (free items; w line width, h text height)
Bottom Overlay:
  lines w10: 449,3374.6 816,3374.6 856,3334.6 856,3169 980,3169 ; 450,3753.6 981,3753.6 ; 2795,3 2795,833 2920,958 2920,1299 ; 3914,1300 3914,958 4042,830 4042,2
  text "AnyCloud" at 1284,1032 h50
  text "C500_DBR_ADT07016BR50_V1.0.2" at 1289,931.6 h30
  text "PN:PBC500260XX" at 1284,836.6 h30
  text "2019/11/28" at 1284,756.6 h30
Top Solder:
  region: 448,3765 985,3765 985,306 448,306 448,3765
  region: 5723,3745.6 6260,3745.6 6260,286.6 5723,286.6 5723,3745.6